# Altium PCB Proto.PcbDoc
Units mil, origin at the board's own origin, x right, y up, seen from the top; angles counter-clockwise.
Board outline 900 x 1140 mil, 4 copper layers (Top Layer, Internal Plane 1, Internal Plane 2, Bottom Layer), stack 18.2 mil thick; 13 components, 15 nets, 42 pads, 0 vias.
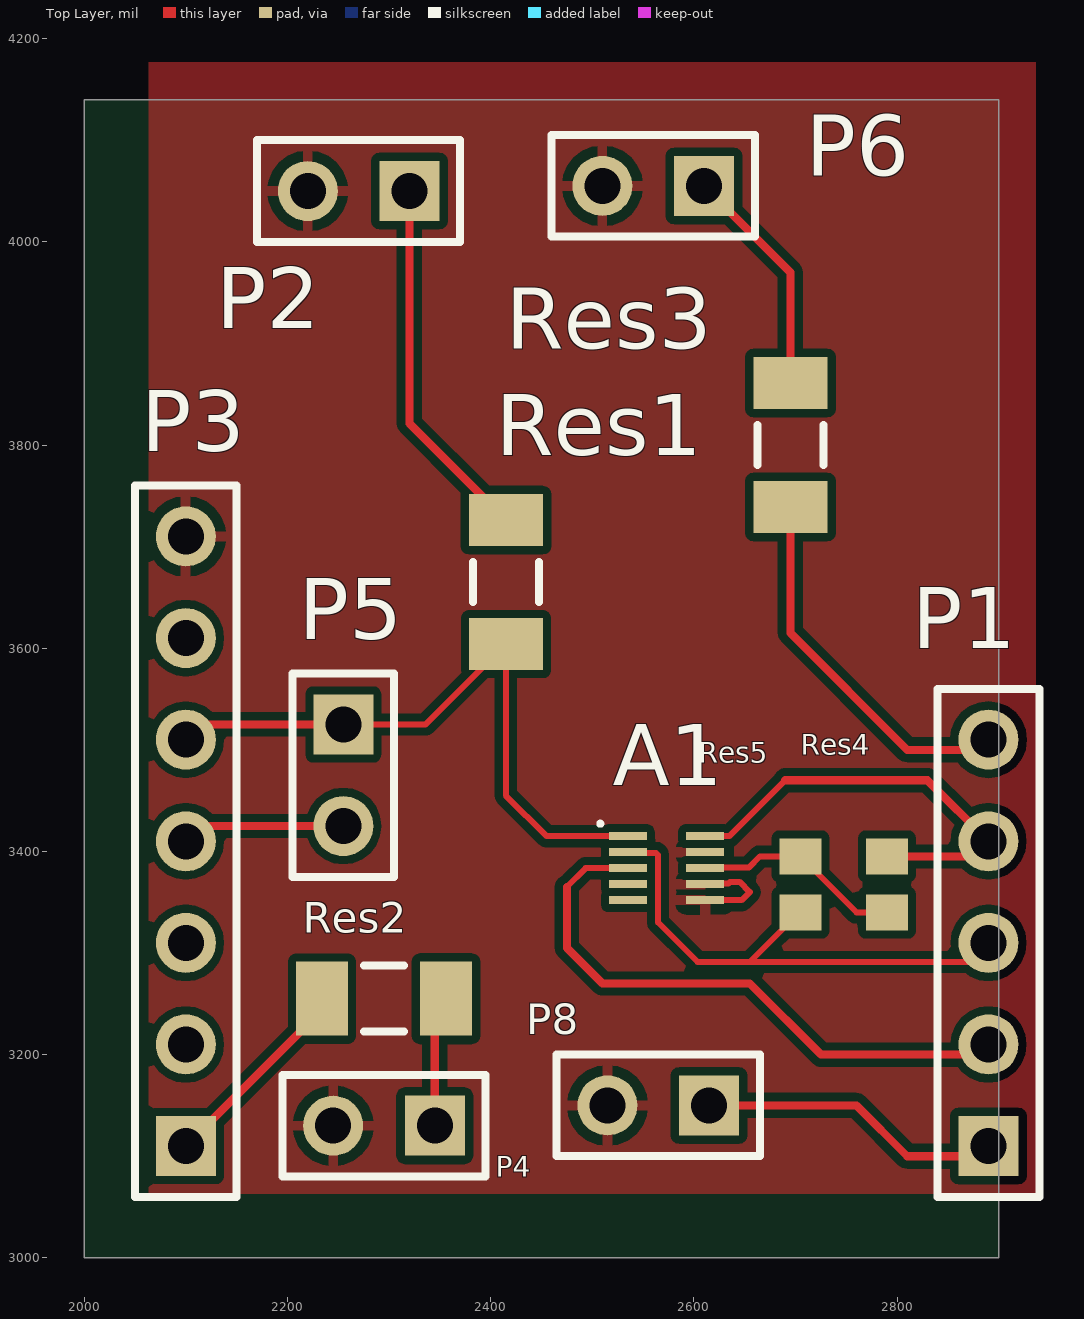
[diagram p0: Top Layer view]
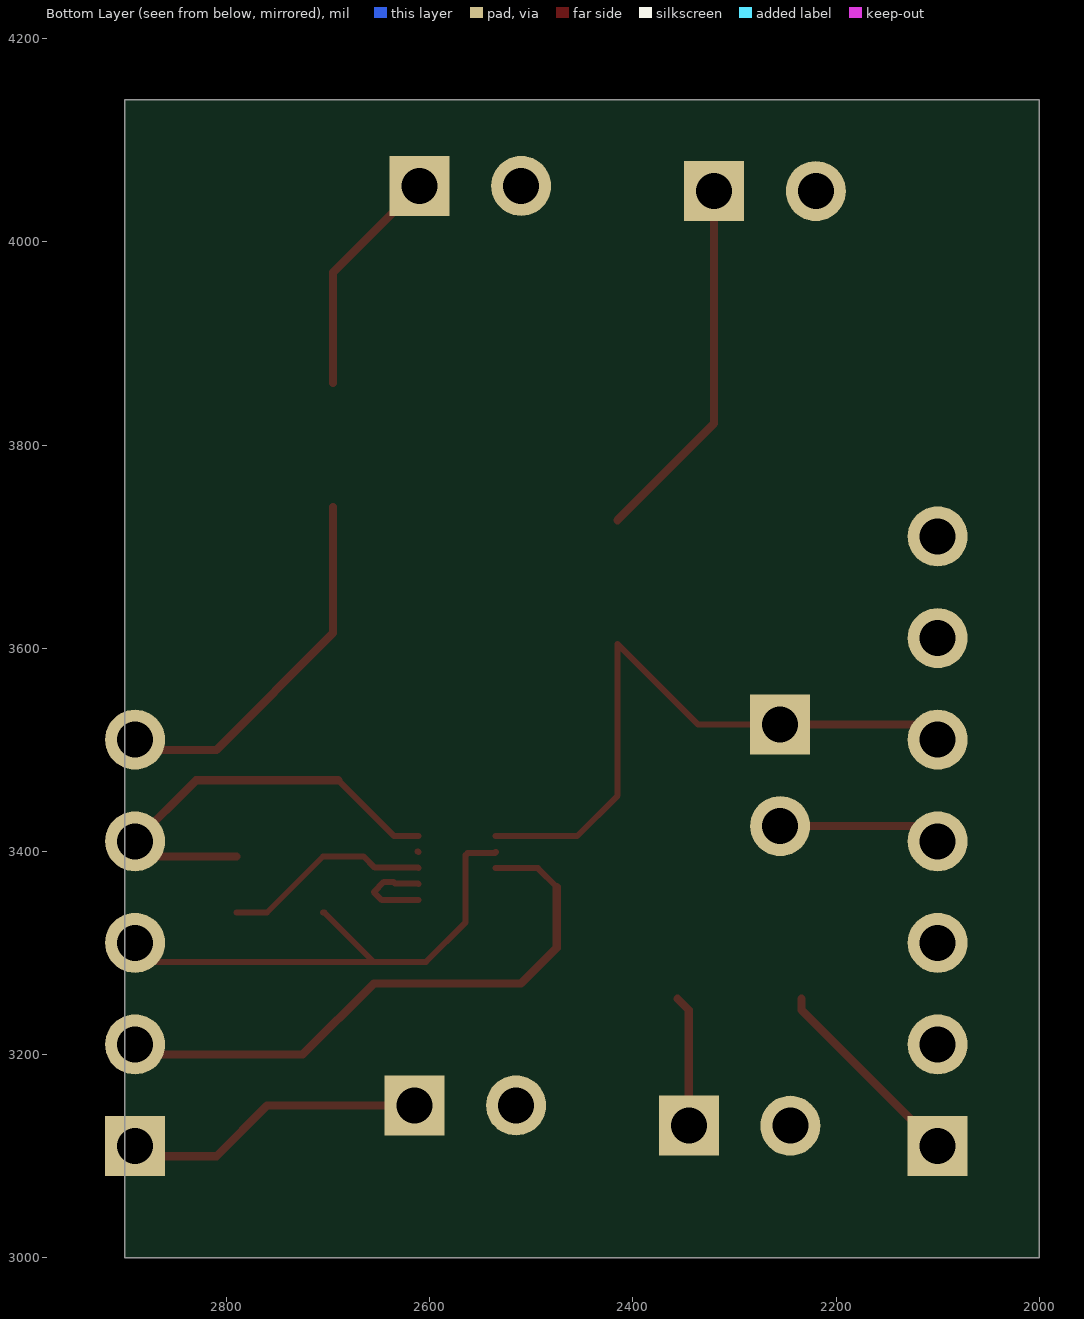
[diagram p1: Bottom Layer view, seen from below]
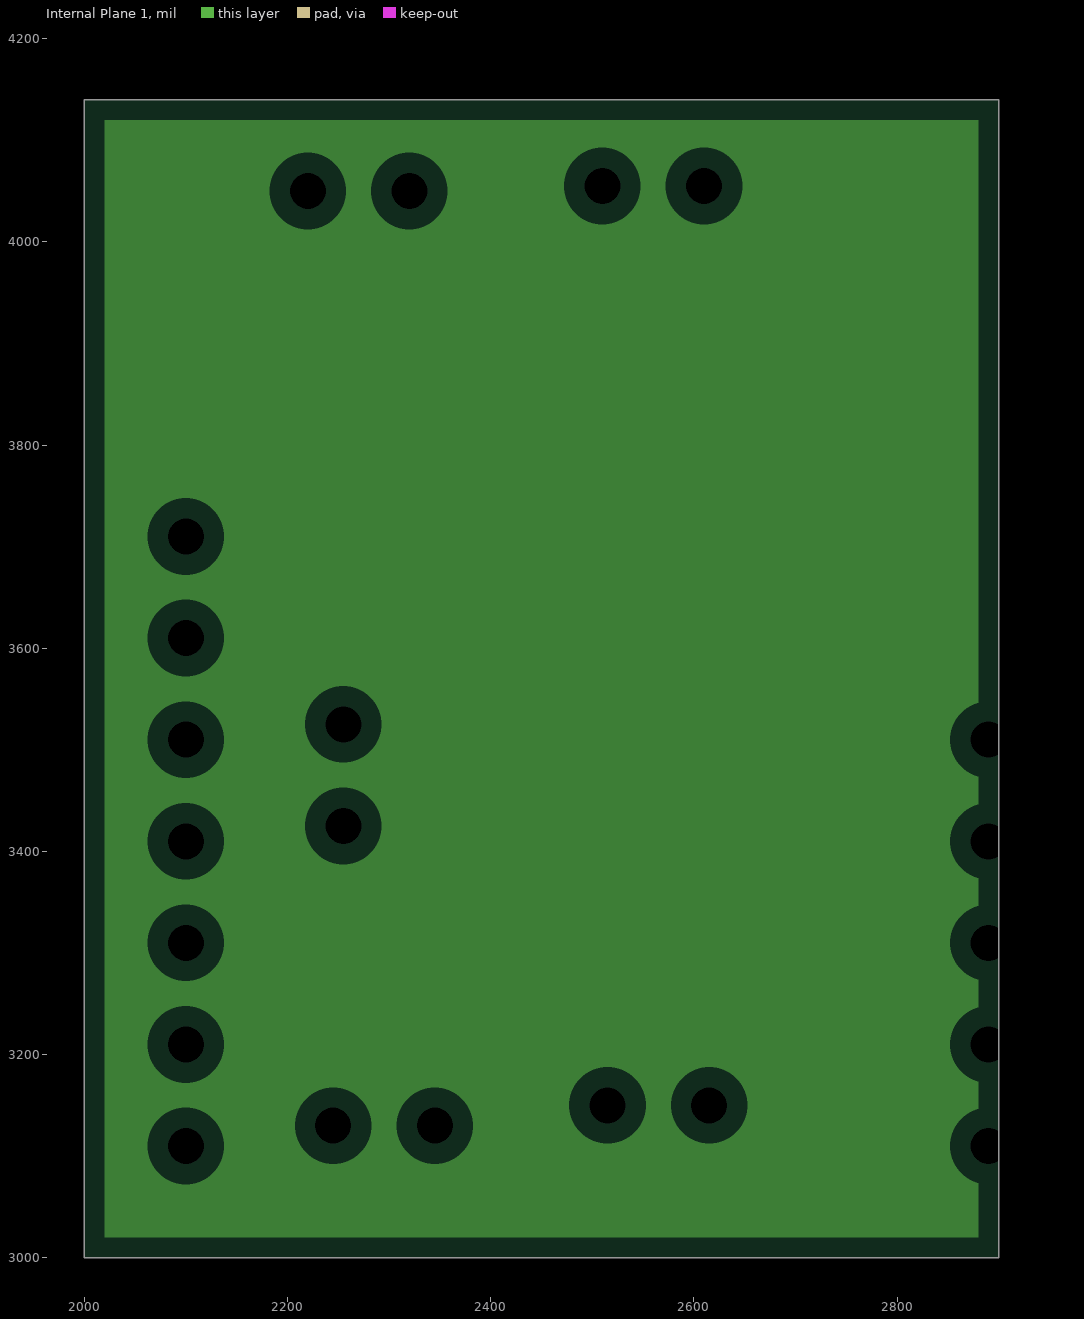
[diagram p2: Internal Plane 1, clearances drawn from the general rule]
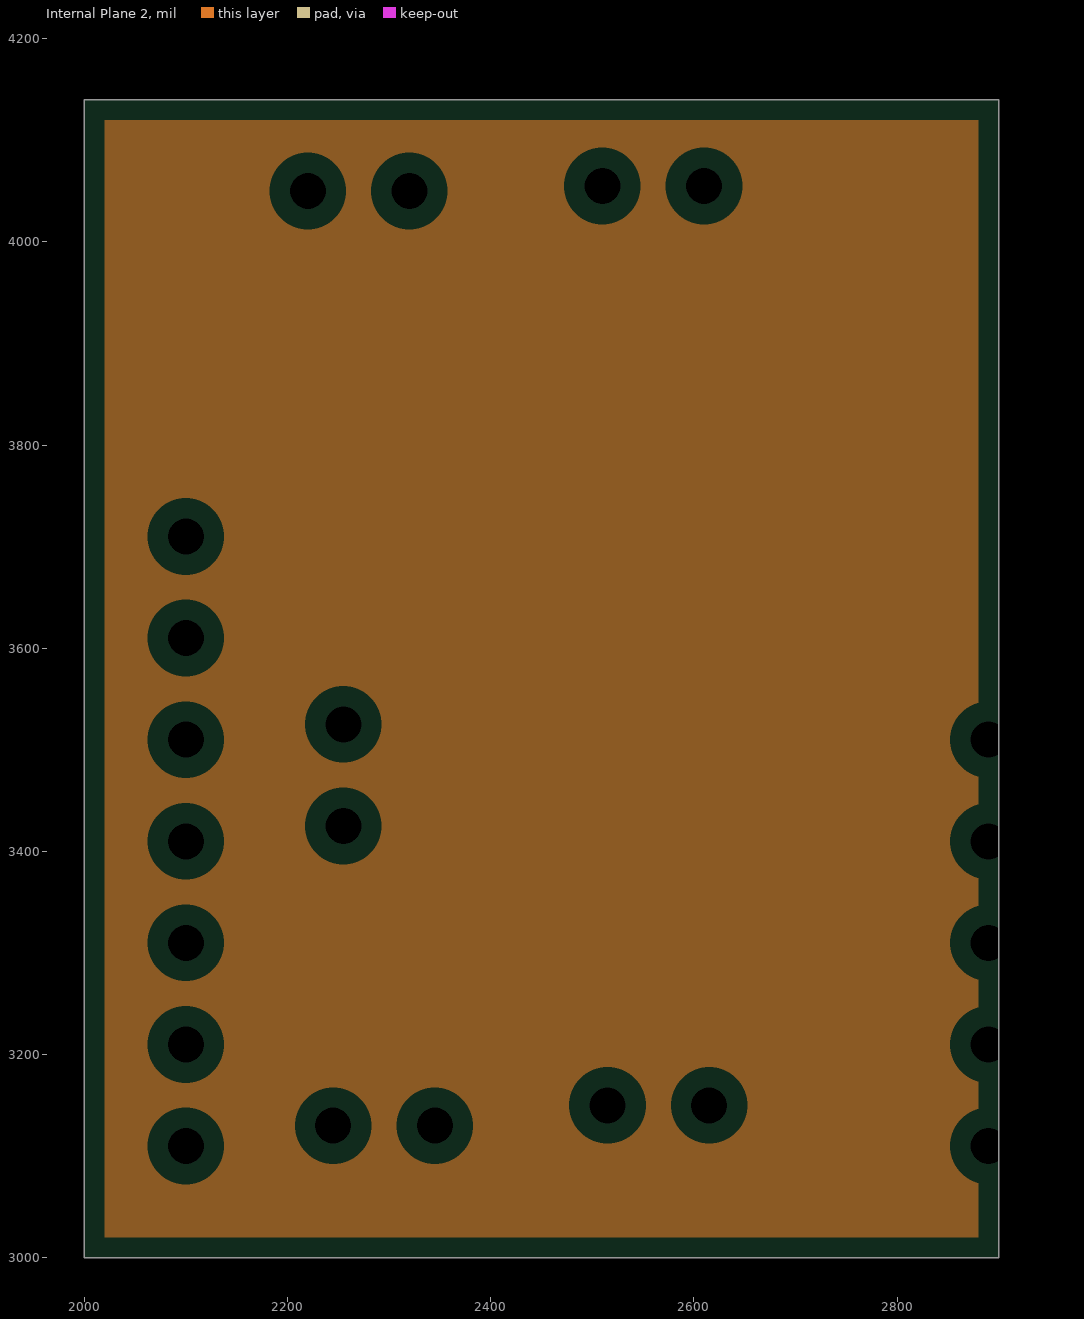
[diagram p3: Internal Plane 2, clearances drawn from the general rule]

## Layer stack, top to bottom
Top Solder: solder mask 0.4, Solder Resist, Dk 3.5
Top Layer: signal copper 1.4
Internal Plane 1: plane copper 1.4
Internal Plane 2: plane copper 1.4
Dielectric 1: dielectric 12.6, FR-4, Dk 4.8
Bottom Layer: signal copper 1.4
Bottom Solder: solder mask 0.4, Solder Resist, Dk 3.5

## Board outline
2000,3000 2900,3000 2900,4140 2000,4140

## Design rules (kind name [scope] priority, off if disabled: settings)
Clearance [All] p1: gap=8 ignorepadtopadclearanceinfootprint=FALSE
PlaneClearance [All] p1: clearance=20
PlaneConnect [All] p1: planeconnectstyle=Relief reliefexpansion=20 reliefentries=4 reliefconductorwidth=10 reliefairgap=10
PolygonConnect [All] p1: connectstyle=Relief reliefconductorwidth=10 reliefentries=4 polygonreliefangle="90 Angle" airgapwidth=10
RoutingVias [All] p1: holewidth=25 width=40 viastyle="Through Hole" minholewidth=28 minwidth=50 maxholewidth=28 maxwidth=50
SolderMaskExpansion [All] p1: expansion=4
Width [All] p1: maxlimit=8 minlimit=6 preferedwidth=8 minimp=50.000000 maximp=50.000000 favimp=50.000000
28 further rules are at their usual default settings.

## Components (designator, comment, footprint, x,y, rotation, side; value= is the part's Value field where it differs from the comment)
A1 "ACCELERO" SON40P200X100-10M 2572.99,3383.5 r0 top
P1 "RFDUINO 2" HDR1X5 2890,3110 r90 top
P2 "LED1" HDR1X2 2320,4050 r180 top
P3 "RFDUINO 1" HDR1X7 2100,3110 r90 top
P4 "LED2" HDR1X2 2345,3130 r180 top
P5 "BOUTON" HDR1X2 2255,3525 r270 top
P6 "LED3" HDR1X2 2610,4055 r180 top
P8 "BUZZER" HDR1X2 2615,3150 r180 top
Res1 "Resistor 330" RESC3116X06M 2415,3665 r90 top
Res2 "Resistor 330" RESC3116X06M 2295,3255 r0 top
Res3 "Resistor 330" RESC3116X06M 2695,3800 r90 top
Res4 "res 1Kohms 0603 CMS" RESC1608X06M 2790,3367.44 r90 top
Res5 "res 1Kohms 0603 CMS" RESC1608X06M 2705,3367.44 r270 top

## Footprints (in the part's own frame and the unit in brackets; to place one, negate y for a bottom-side part, rotate by r counter-clockwise, add the part's x,y. Pads: shape width x height; smd on the part's side, far side on the other; paste and mask are expansions set on the pad)
HDR1X2 [mm] "Connector; Header; 2 Position"
  rect 1.5x1.5 hole 0.9: 1(0,0)
  round 1.5 hole 0.9: 2(2.54,0)
  silkscreen extent -1.27,-1.27 3.81,1.27
HDR1X5 [mm] "Connector; Header; 5 Position"
  rect 1.5x1.5 hole 0.9: 1(0,0)
  round 1.5 hole 0.9: 2(2.54,0) 3(5.08,0) 4(7.62,0) 5(10.16,0)
  silkscreen extent -1.27,-1.27 11.43,1.27
HDR1X7 [mm] "Connector; Header; 7 Position"
  rect 1.5x1.5 hole 0.9: 1(0,0)
  round 1.5 hole 0.9: 2(2.54,0) 3(5.08,0) 4(7.62,0) 5(10.16,0) 6(12.7,0) 7(15.24,0)
  silkscreen extent -1.27,-1.27 16.51,1.27
RESC1608X06M [mm] "Chip Resistor, 2-Leads, Body 1,60x0,80mm, IPC Low Density"
  rect 0.9x1.05 smd: 1(-0.7,0) 2(0.7,0)
  body extent -0.85,-0.48 0.85,0.48, height 0.55
RESC3116X06M [mm] "Chip Resistor, 2-Leads, Body 3,15x1,60mm, IPC Low Density"
  rect 1.3x1.85 smd: 1(-1.55,0) 2(1.55,0)
  silkscreen extent -0.5,-0.82 0.5,0.82, body extent -1.65,-0.87 1.65,0.87, height 0.6
SON40P200X100-10M [mm] "SON, 10-Leads, Body 2,00x2,00mm, Pitch 0,40mm, IPC Low Density"
  rect 0.95x0.2 smd: 1(-0.965,0.8) 2(-0.965,0.4) 3(-0.965,0) 4(-0.965,-0.4) 5(-0.965,-0.8) 6(0.965,-0.8) 7(0.965,-0.4) 8(0.965,0) 9(0.965,0.4) 10(0.965,0.8)
  silkscreen extent -1.7,1.06 -1.6,1.16, body extent -1,-1 1,1, height 1

## Part data
A1: library part MMA8653FCR1, "Accéléromètres 3-axis 2g/4g/8g 10 bit", Manufacturer="NXP / Freescale", Supplier Part Number=841-MMA8653FCR1, Manufacturer Part Member=MMA8653FCR1, Published=15/02/2017, Publisher="François Lefevre", Supplier=Mouser
P1: library part "Header 5", "Header, 5-Pin", LatestRevisionDate=17-Jul-2002, LatestRevisionNote="Re-released for DXP Platform.", Publisher="Altium Limited"
P2 P4 P5 P6 P8: library part "Header 2", "Header, 2-Pin", LatestRevisionDate=17-Jul-2002, LatestRevisionNote="Re-released for DXP Platform.", Publisher="Altium Limited"
P3: library part "Header 7", "Header, 7-Pin", LatestRevisionDate=17-Jul-2002, LatestRevisionNote="Re-released for DXP Platform.", Publisher="Altium Limited"
Res1 Res2 Res3: library part CRCW1206330RFKEA, "Résistance CMS 330 Ohms  250 mW  size 1206 taille 3.2x1.6 mm série CRCW", Manufacturer=Mouser, Power="250 mW", Resistance="330 Ohms", Supplier Part Number=71-CRCW1206-330-E3, Temp./coefficient="100 ppm/K", Tolerance=1%, Manufacturer Part Number=CRCW1206330RFKEA, Published=16/02/2017, Publisher="François Lefevre", Supplier=Mouser
Res4 Res5: library part Res1000

## Nets (pads, with @x,y where several pads share a name; then routed paths per layer and width w, separated by ;. In a path a pad name is that pad's centre, name@x,y a point inside that pad or via, vN(x,y) a via of type N, cw(c..) or ccw(c..) an arc to the next point about the centre after c; other vN are vias at no path point)
GND: A1.6 A1.7 A1.9 P2.2 P3.7 P4.2 P6.2 P8.2 | length 97.5
  Top Layer w6: A1.6 2647.01,3352.01 2655,3360 2645,3370 2635.67,3370 2634.24,3368.57 2611.8,3368.57 A1.7 ; A1.9 A1.9@2611.73,3400
NetA1_2: A1.2 P1.3 Res5.2 | length 516.5
  Top Layer w6: A1.2 2535.81,3398.44 2562.69,3398.44 2564.7,3396.43 2564.7,3330.3 2603.83,3291.17 2655,3291.17 ; Res5.2 2703.72,3339.88 2655,3291.17 ; P1.3 2871.17,3291.17 2655,3291.17
NetA1_3: A1.3 P1.2 | length 590.3
  Top Layer w6: 2475,3365 2493.5,3383.5 A1.3
  Top Layer w8: 2475,3365 2475,3305 2510,3270 2655,3270 2725,3200 2880,3200 P1.2
NetA1_8: A1.8 Res4.1 Res5.1 | length 206.6
  Top Layer w6: A1.8 2611.48,3384 2654,3384 2665,3395 Res5.1 2760.12,3339.88 Res4.1
NetA1_10: A1.10 P1.4 Res4.2 | length 432.9
  Top Layer w6: A1.10 2635,3415 2690,3470
  Top Layer w8: 2690,3470 2830,3470 P1.4 2875,3395 Res4.2
NetP1_1: P1.1 P8.1 | length 299.9
  Top Layer w8: P8.1 2760,3150 2810,3100 2880,3100 P1.1
NetP1_5: P1.5 Res3.1 | length 370.8
  Top Layer w8: Res3.1 2695,3615 2810,3500 2880,3500 P1.5
NetP2_1: P2.1 Res1.2 | length 363.3
  Top Layer w8: P2.1 2320,3821.02 Res1.2
NetP3_1: P3.1 Res2.1 | length 205.5
  Top Layer w6: P3.1@2105,3105 P3.1@2105,3110
  Top Layer w8: P3.1 2233.98,3243.98 Res2.1
NetP3_2: P3.2
NetP3_3: P3.3
NetP3_4: P3.4 P5.2 | length 161.2
  Top Layer w8: P3.4 2115,3425 P5.2
NetP4_1: P4.1 Res2.2 | length 145.2
  Top Layer w8: P4.1@2356.02,3141.02 P4.1 2345,3243.98 Res2.2
NetP6_1: P6.1 Res3.2 | length 229.2
  Top Layer w8: P6.1 2695,3970 Res3.2
VCC: A1.1 P3.5 P5.1 Res1.1 | length 639.5
  Top Layer w6: P5.1 2336.02,3525 Res1.1 2415,3455 2455,3415 A1.1
  Top Layer w8: P3.5 2115,3525 P5.1
pads on no net: A1.4 A1.5 P3.6

## Polygon pours and split planes (outlines as drawn)
GND on Top Layer "Plan de masse" (solid, pour order 14): 2050,4190 2950,4190 2950,3050 2050,3050

## Silkscreen, mask and mechanical layers (free items; w line width, h text height)
Mechanical 1:
  lines w10: 2030,3045 2955,3045 2955,4190 2030,4190 2030,3045